# Altium PCB PCB1.PcbDoc
Units mil, origin at the board's own origin, x right, y up, seen from the top; angles counter-clockwise.
Board outline 944.88 x 1338.58 mil, 2 copper layers (Top Layer, Bottom Layer); 32 components, 19 nets, 113 pads, 27 vias.
Unrouted connection lines stored in the file: 23.
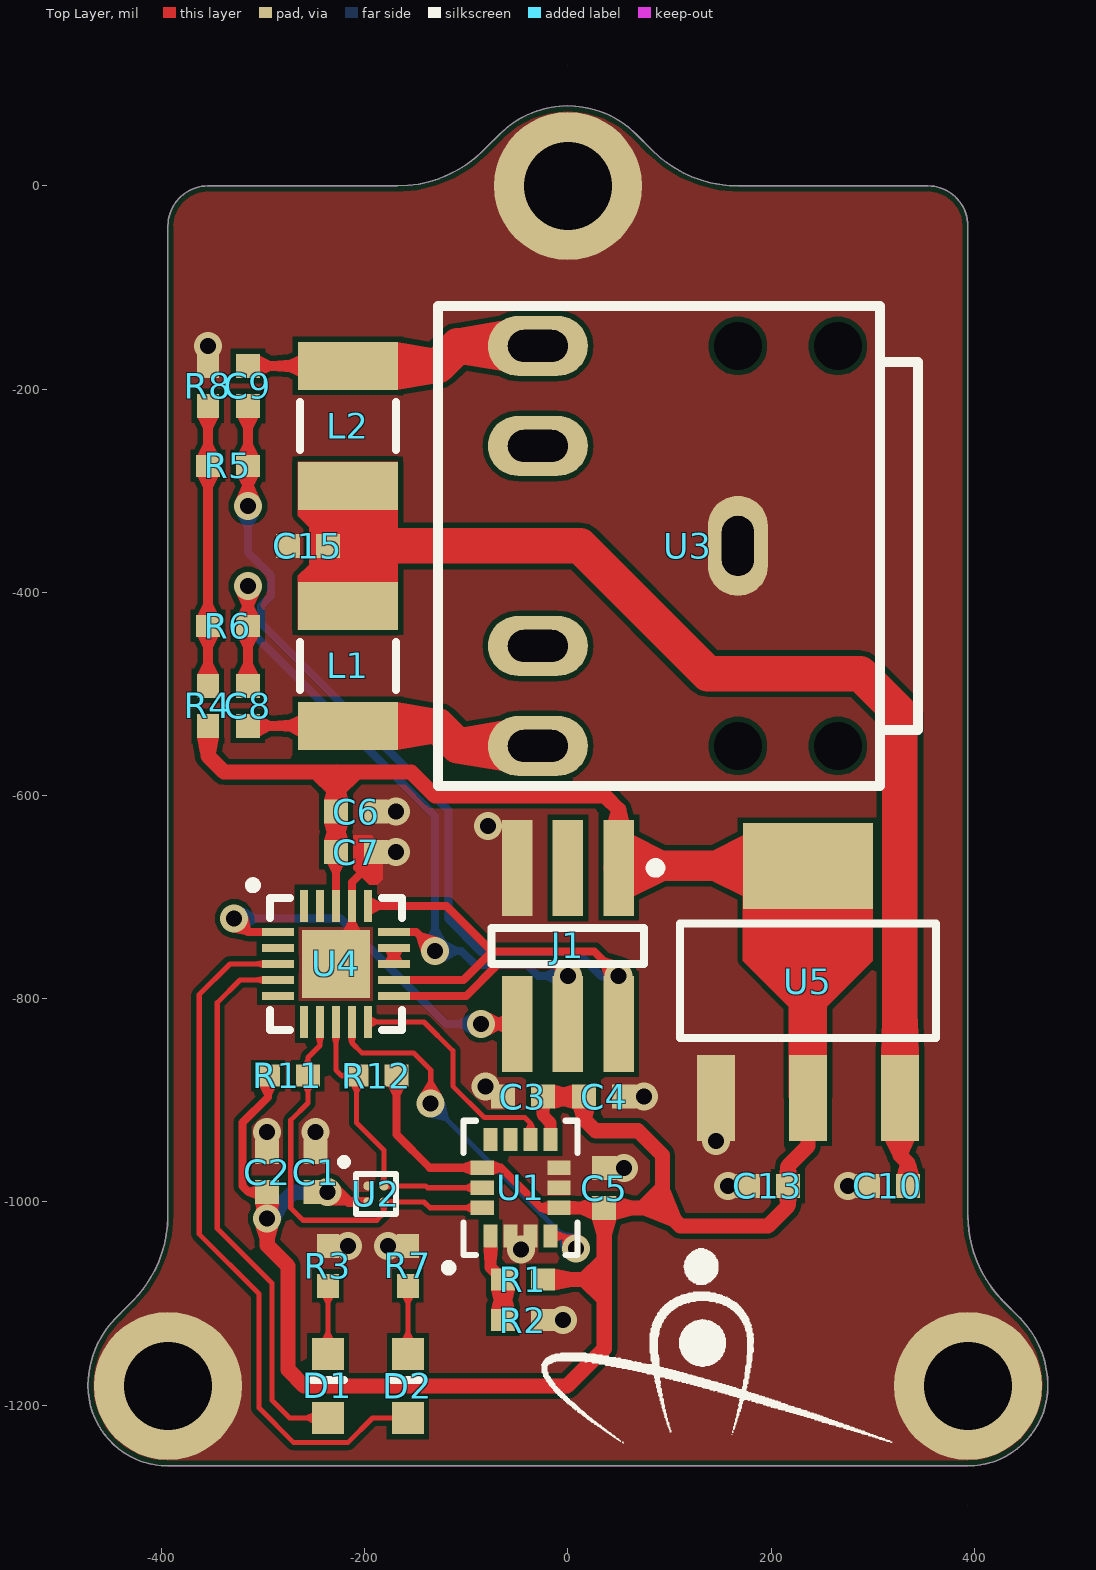
[diagram p0: Top Layer view]
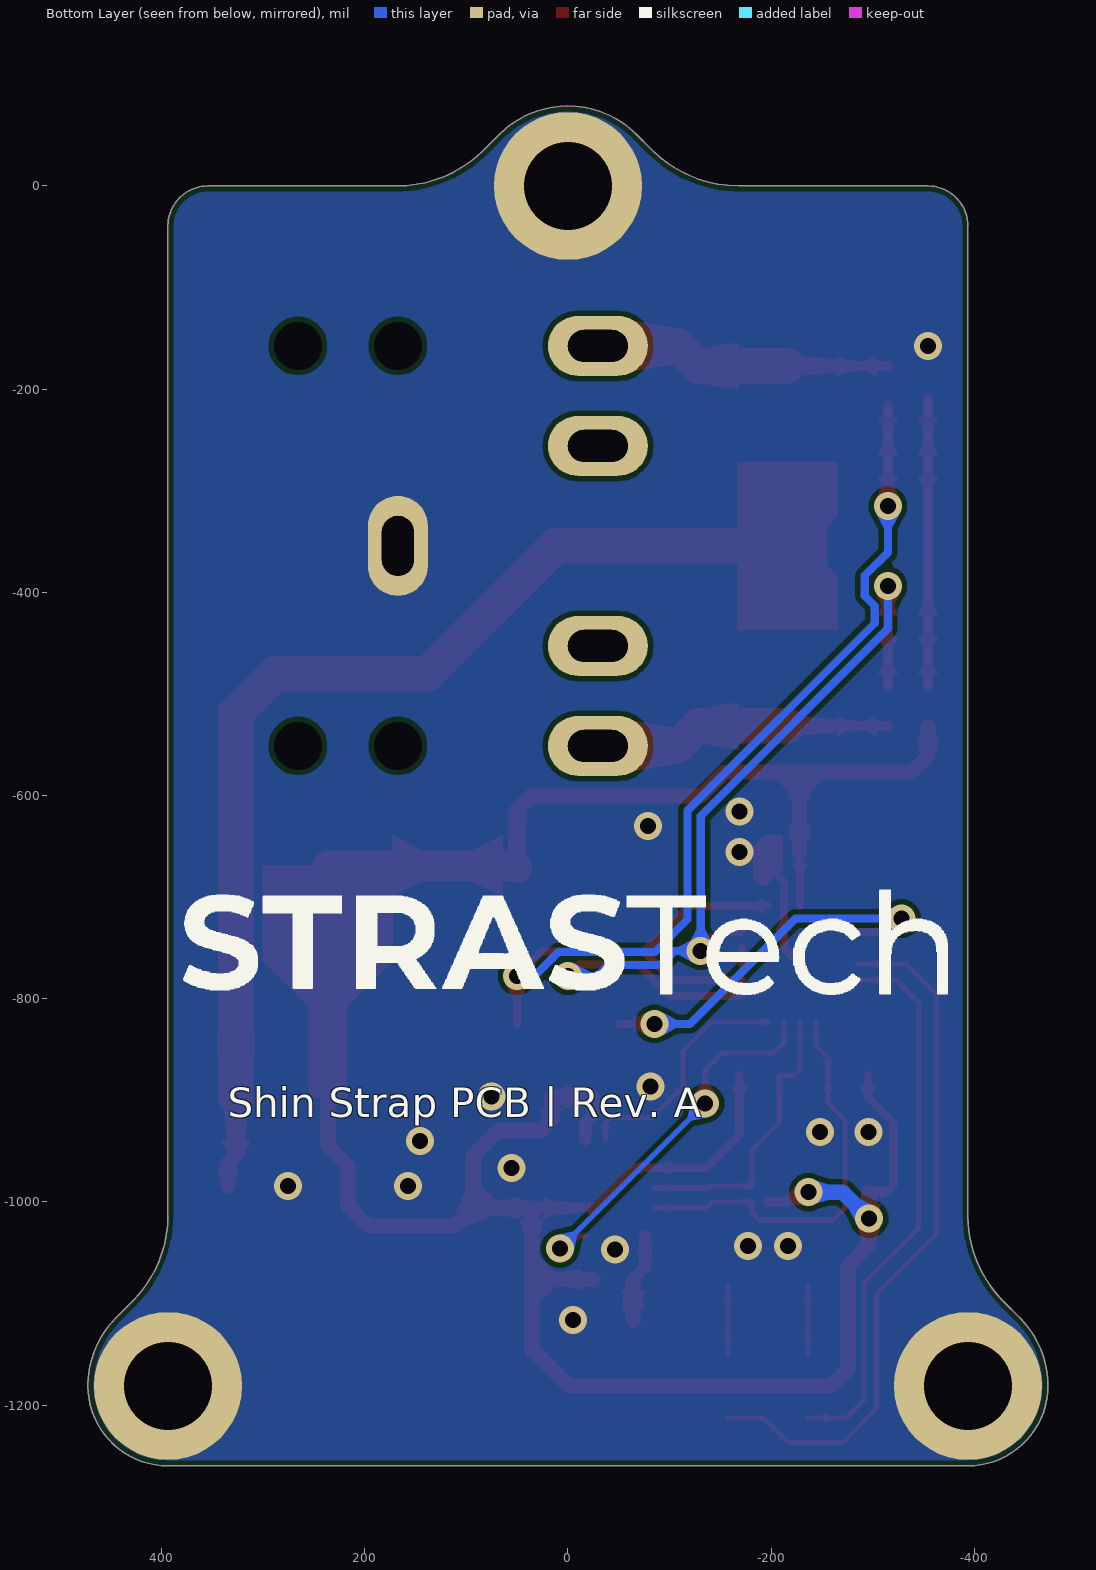
[diagram p1: Bottom Layer view, seen from below]
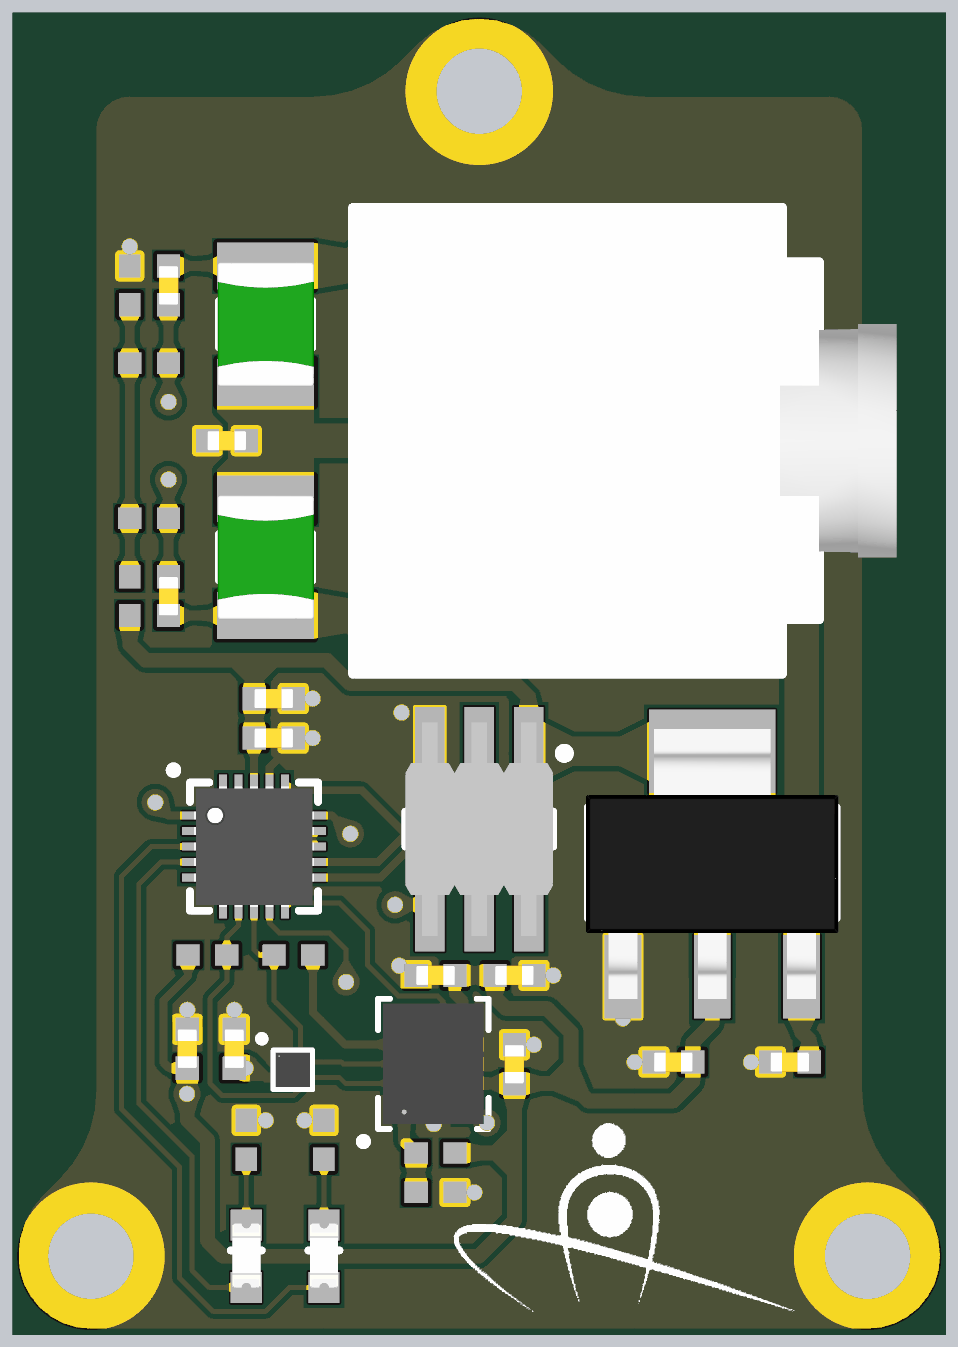
[diagram p2: 3D render of the assembled board from above, using the file's embedded part models]

## Layer stack, top to bottom
Top Solder: solder mask 0.4, Solder Resist, Dk 3.5
Top Layer: signal copper 1.4
Dielectric 1: dielectric 12.6, FR-4, Dk 4.8
Bottom Layer: signal copper 1.4
Bottom Solder: solder mask 0.4, Solder Resist, Dk 3.5

## Board outline
-472.44,-1181.1 cw(c-377.39,-1181.1) -444.6,-1113.89 -429.06,-1098.35 ccw(c-514.41,-1012.99) -393.7,-1012.99 -393.7,-39.37 cw(c-354.33,-39.37) -354.33,0 -168.11,0 ccw(c-168.11,120.71) -82.76,35.36 -67.21,50.9 cw(c0,-16.31) 0,78.74 cw(c0,-16.31) 67.21,50.9 82.75,35.36 ccw(c168.11,120.71) 168.11,0 354.33,0 cw(c354.33,-39.37) 393.7,-39.37 393.7,-1012.99 ccw(c514.41,-1012.99) 429.06,-1098.35 444.6,-1113.89 cw(c377.39,-1181.1) 472.44,-1181.1 cw(c393.7,-1181.1) 393.7,-1259.84 -393.7,-1259.84 cw(c-393.7,-1181.1)

## Design rules (kind name [scope] priority, off if disabled: settings)
Clearance [All] p1: gap=5 ignorepadtopadclearanceinfootprint=FALSE except(0: Arc-Hole Track-Hole SMDPad-Hole THPad-Hole Via-Hole Fill-Hole Poly-Hole Region-Hole Text-Hole)
MinimumSolderMaskSliver [All] p1: minsoldermaskwidth=0
PlaneClearance [All] p1: clearance=10
PlaneConnect [All] p1: planeconnectstyle=Direct reliefexpansion=20 reliefentries=4 reliefconductorwidth=10 reliefairgap=10
PolygonConnect [All] p1: connectstyle=Direct reliefconductorwidth=10 reliefentries=4 polygonreliefangle="90 Angle" airgapwidth=10
RoutingVias [All] p1: holewidth=15.75 width=27.56 viastyle="Through Hole" minholewidth=15.75 minwidth=27.56 maxholewidth=15.75 maxwidth=27.56
SilkToSilkClearance [All] p1: silktosilkclearance=0
SilkToSolderMaskClearance [IsPad] p1: minsilkscreentomaskgap=0 clearancetoexposedcopper=TRUE
SolderMaskExpansion [All] p1: expansion=4 istentingtop=FALSE
Width [All] p1: maxlimit=100 minlimit=5 preferedwidth=10
25 further rules are at their usual default settings.

## Components (designator, comment, footprint, x,y, rotation, side; value= is the part's Value field where it differs from the comment)
C1 "100nF" Cap,SMD,0402 -248.35,-970.7 r90 top
C2 "1uF" Cap,SMD,0402 -295.99,-970.7 r270 top
C3 "100nF" Cap,SMD,0402 -44.33,-896.38 r0 top
C4 "1uF" Cap,SMD,0402 35.67,-896.38 r180 top
C5 "100nF" Cap,SMD,0402 35.67,-986.38 r270 top
C6 "1uF" Cap,SMD,0402 -208.35,-615.75 r180 top
C7 "100nF" Cap,SMD,0402 -208.35,-655.75 r180 top
C8 "100nF" Cap,SMD,0402 -314.96,-511.81 r270 top
C9 "100nF" Cap,SMD,0402 -314.96,-196.85 r90 top
C10 "10uF" Cap,SMD,0402 314.96,-984.25 r0 top
C13 "10uF" Cap,SMD,0402 196.85,-984.25 r0 top
C15 "10uF" Cap,SMD,0402 -255.9,-354.33 r0 top
D1 "Red" LED,0603 -236.22,-1181.1 r90 top
D2 "Green" LED,0603 -157.48,-1181.1 r90 top
J1 "Term,Header,3x2 Pin,1.27mm,SMD" TERM,HEADER,3X2PIN,P1.27,SMD 0,-748.03 r270 top
L1 "1mH" IND,1210 -216.54,-472.44 r90 top
L2 "1mH" IND,1210 -216.54,-236.22 r270 top
R1 "0R" RES,0402 -44.33,-1076.38 r180 top
R2 "0R" RES,0402 -44.33,-1116.38 r180 top
R3 "150R" RES,0402 -236.22,-1062.99 r90 top
R4 "10k" RES,0402 -354.33,-511.81 r270 top
R5 "470k" RES,0402 -334.65,-275.59 r180 top
R6 "470k" RES,0402 -334.65,-433.07 r180 top
R7 "150R" RES,0402 -157.48,-1062.99 r90 top
R8 "10k" RES,0402 -354.33,-196.85 r270 top
R11 "10k" RES,0402 -275.59,-875.75 r180 top
R12 "10k" RES,0402 -188.35,-875.75 r0 top
U1 "ISM330DHCXTR" IC,LGA-14L,2.5x3mm -46.59,-986.07 r90 top
U2 "MMC5633NJL" IC,WLP,2x2,P0.4mm -196.85,-984.25 r0 top
U3 "Conn,Jack,TRS,3.5mm,Thru" CONN,JACK,TRS,3.5MM,THRU 118.11,-354.33 r180 top
U4 "PIC18F14Q40-I/REB" IC,QFN-20,3x3,PAD,P0.4 -228.35,-765.75 r0 top
U5 "TLV1117LV33DCYR" SOT223 236.22,-897.64 r0 top

## Footprints (in the part's own frame and the unit in brackets; to place one, negate y for a bottom-side part, rotate by r counter-clockwise, add the part's x,y. Pads: shape width x height; smd on the part's side, far side on the other; paste and mask are expansions set on the pad)
Cap,SMD,0402 [mm] "KEMET C0402C100K5GACTU"
  rect 0.6x0.6 smd: 1(-0.5,0) 2(0.5,0)
  body extent -0.5,-0.25 0.5,0.25, height 0.5
CONN,JACK,TRS,3.5MM,THRU [mm] "CUI Devices SJ1-3525N"
  round 0 hole 1.2 unplated mask+0.05: 0(-3.75,5) 0(-3.75,-5) 0(-1.25,5) 0(-1.25,-5)
  rrect100% 1.5x2.5 hole 0.8 slot 1.5 at 90 deg mask+0.05: 1(-1.25,0)
  rrect100% 2.5x1.5 hole 0.8 slot 1.5 at 0 deg mask+0.05: 2(3.75,-5) 3(3.75,5) 10(3.75,-2.5) 11(3.75,2.5)
  silkscreen extent -5.75,-6 6.25,6, body extent -7.75,-6 6.25,6, height 5.6
IC,LGA-14L,2.5x3mm [mil] "STMicroelectronics ISM330DHCXTR"
  rect 23x14 smd paste+0 mask+1.97: 1(-47.5,29.53) 2(-47.5,9.84) 3(-47.5,-9.85) 4(-47.5,-29.54) 8(47.5,-29.54) 9(47.5,-9.85) 10(47.5,9.84) 11(47.5,29.53)
  rect 14x23 smd paste+0 mask+1.97: 5(-19.69,-37.74) 6(0,-37.74) 7(19.69,-37.74) 12(19.69,37.74) 13(0,37.74) 14(-19.69,37.74)
  silkscreen extent -82,-56 66,75, body extent -61,-51 61,51, height 65
IC,QFN-20,3x3,PAD,P0.4 [mm] "Semtech SX1508B"
  rect 0.8x0.2 smd mask+0.05: 1(-1.45,0.8) 2(-1.45,0.4) 3(-1.45,0) 4(-1.45,-0.4) 5(-1.45,-0.8) 11(1.45,-0.8) 12(1.45,-0.4) 13(1.45,0) 14(1.45,0.4) 15(1.45,0.8)
  rect 0.2x0.8 smd mask+0.05: 6(-0.8,-1.45) 7(-0.4,-1.45) 8(0,-1.45) 9(0.4,-1.45) 10(0.8,-1.45) 16(0.8,1.45) 17(0.4,1.45) 18(0,1.45) 19(-0.4,1.45) 20(-0.8,1.45)
  rect 1.7x1.7 smd mask+0.05: 21(0,0)
  silkscreen extent -2.17,-1.65 1.65,2.07, body extent -1.55,-1.55 1.55,1.55, height 0.6
IC,WLP,2x2,P0.4mm [mm] "Memsic Inc. MMC5633NJL"
  round 0.23 smd mask+0.05: A1(0,0) A2(0.4,0) B1(0,-0.4) B2(0.4,-0.4)
  silkscreen extent -0.67,-0.7 0.7,0.67, body extent -0.24,-0.64 0.64,0.24, height 0.61
IND,1210 [mm] "Taiyo Yuden CBC3225T102MR"
  rect 1.2x2.5 smd: 1(-1.5,0) 2(1.5,0)
  silkscreen extent -0.6,-1.2 0.6,1.2, body extent -1.6,-1.25 1.6,1.25, height 0.96
LED,0603 [mm] "Stanley Electric Co THG1111C-0005-TR"
  rect 0.8x0.8 smd mask+0.05: 1(-0.8,0) 2(0.8,0)
  silkscreen extent 0.15,-0.4 0.15,0.4, body extent -0.81,-0.37 0.84,0.36, height 0.68
RES,0402 [mm] "Yageo RC0402FR-0722RL"
  rect 0.6x0.55 smd: 1(-0.5,0) 2(0.5,0)
  body extent -0.5,-0.25 0.5,0.25, height 0.35
SOT223 [mm] "Texas Instruments TLV1117LV33DCYR"
  rect 0.95x2.15 smd mask+0.05: 1(-2.3,0) 2(0,0) 3(2.3,0)
  rect 3.25x2.15 smd mask+0.05: 4(0,5.8)
  silkscreen extent -3.2,1.5 3.2,4.36, body extent -3.25,-0.58 3.25,6.38, height 1.65
TERM,HEADER,3X2PIN,P1.27,SMD [mm] "Amphenol ICC (FCI) 20021121-00006C4LF"
  rect 2.4x0.76 smd mask+0.05: 1(-1.95,1.27) 2(-1.95,0) 3(-1.95,-1.27) 4(1.95,-1.27) 5(1.95,0) 6(1.95,1.27)
  silkscreen extent -2.07,-1.91 0.45,2.31, body extent -2.75,-1.91 2.75,1.91, height 4.5

## Part data
C1 C3 C5 C7 C8 C9: library part CAP,Cer,100nF,25VDC,X7R,0402, "0.1µF ±10% 25V Ceramic Capacitor X7R 0402 (1005 Metric)", Manufacturer="Murata Electronics", Manufacturer Part Number=GRM155R71E104KE14J, Vendor Part Number=490-14603-1-ND, CreatedBy="Judd Foster", HelpURL=https://search.murata.co.jp/Ceramy/image/img/A01X/G101/ENG/GRM155R71E104KE14-01.pdf, Vendor=Digikey
C2 C4 C6: library part CAP,Cer,1uF,35VDC,X5R,0402, "1 µF ±10% 35V Ceramic Capacitor X5R 0402 (1005 Metric)", Manufacturer="TDK Corporation", Manufacturer Part Number=C1005X5R1V105K050BC, Vendor Part Number=445-9073-1-ND, CreatedBy="Judd Foster", HelpURL=https://product.tdk.com/info/en/catalog/datasheets/mlcc_commercial_general_en.pdf?ref_disty=digikey, Vendor=Digikey
C10 C13 C15: library part CAP,Cer,10uF,10VDC,X5R,0402, "10 µF ±20% 10V Ceramic Capacitor X5R 0402 (1005 Metric)", Manufacturer="Samsung Electro-Mechanics", Manufacturer Part Number=CL05A106MP5NUNC, Vendor Part Number=1276-1450-1-ND, CreatedBy="Judd Foster", HelpURL=https://media.digikey.com/pdf/Data%20Sheets/Samsung%20PDFs/CL05A106MP5NUNC_Spec.pdf, Vendor=Digikey
D1: library part LED,Red,SMD,0603, "Red 633nm LED Indication - Discrete 2V 0603 (1608 Metric)", Manufacturer="Lite-On Inc.", Manufacturer Part Number="LS Q976-NR-1", Vendor Part Number=475-2512-1-ND, CreatedBy="Judd Foster", HelpURL=https://dammedia.osram.info/media/resource/hires/osram-dam-2493499/LS%20Q976.pdf, Vendor=Digikey
D2: library part LED,Green,SMD,0603, "Green 530nm LED Indication - Discrete 3V 0603 (1608 Metric)", Manufacturer="Stanley Electric Co", Manufacturer Part Number=THG1111C-0005-TR, Vendor Part Number=404-1286-1-ND, CreatedBy="Judd Foster", HelpURL=http://www.stanley-components.com/php/downloaddatafile.php?rp=0,THG1111C-0005_e.pdf, Vendor=Digikey
J1: "Connector Header Surface Mount 6 position 0.050\" (1.27mm)", Manufacturer="Amphenol ICC (FCI)", Manufacturer Part Number=20021121-00006C4LF, Vendor Part Number=609-3693-1-ND, CreatedBy="Judd Foster", HelpURL=https://media.digikey.com/pdf/Data%20Sheets/FCI%20PDFs/Minitek%20127_Catalog.pdf, Vendor=Digikey
L1 L2: library part IND,1mH,100mA,Wirewound,1210, "1 mH Unshielded Wirewound Inductor 100 mA 16.9Ohm Max 1210 (3225 Metric)", Manufacturer="Taiyo Yuden", Manufacturer Part Number=CBC3225T102MR, Vendor Part Number=587-CBC3225T102MRCT-ND, CreatedBy="Judd Foster", HelpURL=https://ds.yuden.co.jp/TYCOMPAS/ut/detail?pn=CBC3225T102MR%20&u=M, Vendor=Digikey
R1 R2: library part RES,0R0,0.1W,0402, "0 Ohms Jumper 0.1W, 1/10W Chip Resistor 0402 (1005 Metric) Automotive AEC-Q200 Thick Film", Manufacturer="Panasonic Electronic Components", Manufacturer Part Number=ERJ-2GE0R00X, Vendor Part Number=P0.0JCT-ND, CreatedBy="Judd Foster", HelpURL=https://industrial.panasonic.com/cdbs/www-data/pdf/RDA0000/AOA0000C301.pdf, Vendor=Digikey
R3 R7: library part RES,150R,1%,0.1W,0402, "150 Ohms ±1% 0.063W, 1/16W Chip Resistor 0402 (1005 Metric) Automotive AEC-Q200, Moisture Resistant Thick Film", Manufacturer="TE Connectivity Passive Product", Manufacturer Part Number=CRGCQ0402F150R, Vendor Part Number=A129617CT-ND, CreatedBy="Judd Foster", HelpURL=https://www.te.com/commerce/DocumentDelivery/DDEController?Action=srchrtrv&DocNm=1773204-3&DocType=DS&DocLang=English, Vendor=Digikey
R4 R8 R11 R12: library part RES,10k,5%,0.063W,0402, "10 kOhms ±5% 0.063W, 1/16W Chip Resistor 0402 (1005 Metric) Automotive AEC-Q200 Thick Film", Manufacturer="Stackpole Electronics Inc", Manufacturer Part Number=RMCF0402JT10K0, Vendor Part Number=RMCF0402JT10K0CT-ND, CreatedBy="Judd Foster", HelpURL=https://www.seielect.com/catalog/sei-rmcf_rmcp.pdf, Vendor=DIgikey
R5 R6: library part RES,470k,5%,0.063W,0402, "470 kOhms ±5% 0.063W, 1/16W Chip Resistor 0402 (1005 Metric) Automotive AEC-Q200 Thick Film", Manufacturer="Stackpole Electronics Inc", Manufacturer Part Number=RMCF0402JT470K, Vendor Part Number=RMCF0402JT470KCT-ND, CreatedBy="Judd Foster", HelpURL=https://www.seielect.com/catalog/sei-rmcf_rmcp.pdf, Vendor=Digikey
U1: "Accelerometer, Gyroscope, Temperature, 6 Axis Sensor I²C, SPI Output", Manufacturer=STMicroelectronics, Vendor Part Number=497-19784-1-ND, CreatedBy="Judd Foster", HelpURL=https://www.st.com/resource/en/datasheet/ism330dhcx.pdf, Manufacturer Part Number=ISM330DHCXTR, Vendor=Digikey
U2: "Magnetoresistive Sensor X, Y, Z Axis 4-WLP (0.85x0.85)", Manufacturer="Memsic Inc.", Vendor Part Number=1267-MMC5633NJLCT-ND, CreatedBy="Judd Foster", HelpURL=https://media.digikey.com/pdf/Data%20Sheets/MEMSIC%20PDFs/MMC5633NJL_RevA_3-12-20.pdf, Manufacturer Part Number=MMC5633NJL, Vendor=Digikey
U3: "3.50mm (0.141\", 1/8\", Mini Plug) - Headphone Phone Jack Stereo (3 Conductor, TRS) Connector Solder", Manufacturer="CUI Devices", Manufacturer Part Number=SJ1-3525N, Vendor Part Number=CP1-3525N-ND, CreatedBy="Judd Foster", HelpURL=https://www.cuidevices.com/product/resource/sj1-352xn.pdf, Vendor=Digikey
U4: "PIC series Microcontroller IC 8-Bit 64MHz 16KB (16K x 8) FLASH 20-VQFN (3x3)", Manufacturer="Microchip Technology", Vendor Part Number=150-PIC18F14Q40-I/REB-ND, CreatedBy="Judd Foster", HelpURL=https://ww1.microchip.com/downloads/en/DeviceDoc/PIC18F04-05-14-15-Q40-1420-Pin-Low-Power-High-Performance-Microcontroller-With-XLP-Technology-Data-Sheet-40002236B.pdf, Manufacturer Part Number=PIC18F14Q40-I/REB, Vendor=Digikey
U5: "Linear Voltage Regulator IC  1 Output  1A SOT-223-4", Manufacturer="Texas Instruments", Vendor Part Number=296-28778-1-ND, CreatedBy="Judd Foster", HelpURL=http://www.ti.com/lit/ds/symlink/tlv1117lv.pdf, Manufacturer Part Number=TLV1117LV33DCYR, Vendor=Digikey

## Free pads (board coordinates)
  round 145.67 hole 86.61 mask+1.97: 0(-393.7,-1181.1) 0(0,0) 0(393.7,-1181.1)

## Via types
v1: diameter 27.56, hole 15.75, Top Layer to Bottom Layer, tented both sides, 27 vias

## Nets (pads, with @x,y where several pads share a name; then routed paths per layer and width w, separated by ;. In a path a pad name is that pad's centre, name@x,y a point inside that pad or via, vN(x,y) a via of type N, cw(c..) or ccw(c..) an arc to the next point about the centre after c; other vN are vias at no path point)
CMPO/RX: U4.13 U4.14 | length 15.7
  Top Layer w8: U4.13 U4.14
DATAN/PGC: C8.1 J1.5 R6.1 U4.11 U4.15 | length 911.7
  Top Layer w8: U4.11 -100.04,-797.24 -69.23,-766.44 -11.12,-766.44 v1(0,-777.56) ; U4.15 -149.29,-734.25 v1(-130.69,-752.85)
  Top Layer w10: C8.1 R6.1 v1(-314.96,-393.7)
  Bottom Layer w8: v1(-314.96,-393.7) -314.96,-435.8 -130.69,-620.07 v1(-130.69,-752.85) -105.04,-752.85 -90.94,-766.95 -39.81,-766.95 -29.2,-777.56 v1(0,-777.56)
DATAP/PGD: C9.1 J1.6 R5.1 U4.12 U4.16 | length 1216.8
  Top Layer w8: U4.16 -119.4,-708.66 -74.62,-753.44 ; U4.12 -102.67,-781.5 -74.62,-753.44 ; J1.6 v1(50,-777.56) 25.88,-753.44 -74.62,-753.44
  Top Layer w10: v1(-314.96,-314.96) R5.1 C9.1@-314.96,-216.54
  Bottom Layer w8: v1(-314.96,-314.96) -314.96,-360.79 -292.18,-383.57 -292.18,-403.7 -301.96,-413.48 -301.96,-430.42 -117.69,-614.69 -117.69,-617.94 -117.69,-721.82 -85.55,-753.95 9.13,-753.95 32.73,-777.56 v1(50,-777.56)
GND: C1.2 C2.1 C3.1 C4.1 C5.1 C6.1 C7.1 C10.1 C13.1 C15.1 J1.3 pad.0 R2.1 R3.2 R7.2 R8.1 U1.2 U1.3 U1.6 U1.7 U2.A1 U3.1 U4.17 U4.21 U5.1 | length 126.4
  Top Layer w8: U4.21 -212.6,-750 U4.17 -212.6,-685.35 -188.66,-661.4 C7.1
  other v1: -4.96,-1116.38 -46.13,-1046.98 -216.54,-1043.31 -177.16,-1043.3 157.48,-984.25 275.59,-984.25 55.35,-966.69 145.67,-939.96 -295.99,-931.33 -248.34,-931.33 75.04,-896.38 -81.06,-886.54 -168.98,-655.75 -78.74,-629.92 -168.98,-615.75 -354.33,-157.48
I2C_SCL: R12.1 U1.13 U2.A2 U4.8 | length 287.2
  Top Layer w5: U4.8 -228.35,-870.33 -222.93,-875.75 R12.1 -208.03,-922.2 -181.1,-949.13 U2.A2 -140.03,-984.25 -138.21,-986.07 U1.13
I2C_SDA: R11.1 U1.14 U2.B2 U4.7 | length 404.8
  Top Layer w5: U4.7 -244.09,-845.95 -255.91,-857.76 R11.1 -255.91,-902.7 -272.81,-919.6 -272.81,-1006.05 -260.85,-1018.01 -188.17,-1018.01 -181.1,-1010.95 U2.B2 -141.55,-1000 -135.79,-1005.76 U1.14
ISM330_INT1: U1.4 U4.9 | length 374.9
  Top Layer w5: U4.9 -212.6,-843.57 -202.88,-853.29 -151.9,-853.29 -135.02,-870.17 v1(-135.02,-903.07) ; U1.4 -3.35,-1033.57 7.8,-1044.72 v1(7.8,-1045.89)
  Bottom Layer w5: v1(-135.02,-903.07) v1(7.8,-1045.89)
ISM330_INT2: U1.9 U4.10 | length 237.9
  Top Layer w5: U4.10 -141.6,-822.83 -113.27,-851.16 -113.27,-886.06 -82.22,-917.11 -42.13,-917.11 -36.74,-922.5 U1.9
LED1: D1.1 U4.4 | length 544.9
  Top Layer w5: U4.4 -322.8,-781.5 -345.17,-803.87 -345.17,-1026.14 -291.23,-1080.08 -291.23,-1195.2 -273.83,-1212.6 D1.1
LED2: D2.1 U4.3 | length 691.9
  Top Layer w5: U4.3 -332.68,-765.75 -362.86,-795.93 -362.86,-1031.77 -303.91,-1090.72 -303.91,-1202.93 -269.9,-1236.94 -216.66,-1236.94 -192.32,-1212.6 D2.1
M\C\L\R\: J1.4 U4.1 | length 369.9
  Top Layer w8: v1(-328.44,-720.99) -315.18,-734.25 U4.1 ; v1(-85.36,-824.8) J1.4
  Bottom Layer w8: v1(-328.44,-720.99) -223.89,-720.99 -120.08,-824.8 v1(-85.36,-824.8)
NetC8_2: C8.2 L1.1 U3.3 | length 293.6
  Top Layer w10: C8.2 L1.1
  Top Layer w35: L1.1 -127.97,-531.5 -108.28,-551.18 U3.3
NetC9_2: C9.2 L2.1 U3.2 | length 293.6
  Top Layer w10: C9.2 L2.1
  Top Layer w35: L2.1 -127.97,-177.17 -108.28,-157.48 U3.2
NetD1_2: D1.2 R3.1 | length 66.9
  Top Layer w5: D1.2 R3.1
NetD2_2: D2.2 R7.1 | length 66.9
  Top Layer w5: D2.2 -157.48,-1108.4 R7.1
NetR1_2: R1.2 R2.2 U1.1 | length 87.8
  Top Layer w12: U1.1 -76.12,-1064.27 R1.2
  Top Layer w15: R2.2 R1.2
NetR4_1: R4.1 R5.2 R6.2 R8.2 | length 282.5
  Top Layer w10: R4.1 R6.2 R5.2 R8.2@-354.33,-209.62
VDD_3V3: C1.1 C2.2 C3.2 C4.2 C5.2 C6.2 C7.2 C13.2 J1.1 R1.1 R4.2 R11.2 R12.2 U1.5 U1.8 U1.12 U2.B1 U4.18 U5.2 U5.4 | length 2673
  Top Layer w8: C2.2 -314.32,-990.39 -320.2,-984.5 -320.2,-921.89 -295.28,-896.97 R11.2 ; U4.18 -228.35,-656.06 C7.2 ; R12.2 -168.66,-933.7 -135.98,-966.38 U1.12 -66.05,-966.38 -26.67,-1005.76 U1.5
  Top Layer w10: C1.1 v1(-236.86,-990.39) -225.37,-990.39 -215.76,-1000 U2.B1
  Top Layer w12: C3.2 -24.65,-914.68 -17.05,-922.27 U1.8 ; U1.5@-8.54,-1006.06 C5.2
  Top Layer w15: R4.2 -354.33,-560.96 -338.4,-576.89 -228.03,-576.89 ; C2.2 -296,-1042.59 -275.59,-1062.99 -275.59,-1165.09 -259.58,-1181.1 -0.83,-1181.1 35.67,-1144.61 35.67,-1076.38 ; C7.2 C6.2 -228.03,-576.89 ; R1.1 35.67,-1076.38 ; C3.2 C4.2 ; C4.2 15.99,-918.63 27.32,-929.96 68.99,-929.96 93.08,-954.06 93.08,-1006.06 ; J1.1 50,-614.04 36.35,-600.39 -130.77,-600.39 -154.27,-576.89 -228.03,-576.89 ; U5.2 236.22,-944.88 216.53,-964.57 C13.2 216.53,-1003.94 196.85,-1023.62 110.64,-1023.62 93.08,-1006.06 ; 35.67,-1076.38 C5.2 93.08,-1006.06
  Top Layer w30: J1.1 51.97,-669.29 U5.4
  Bottom Layer w15: v1(-296.32,-1016.49) -270.22,-990.39 v1(-236.86,-990.39)
VDD_5V: C10.2 C15.2 L1.2 L2.2 U5.3 | length 1099.8
  Top Layer w15: U5.3 326.77,-954.1 334.64,-961.97 C10.2
  Top Layer w35: C15.2 12.08,-354.33 137.71,-479.96 287.85,-479.96 326.77,-518.89 U5.3
pads on no net: J1.2 U1.10 U1.11 U3.0 U3.10 U3.11 U4.2 U4.5 U4.6 U4.19 U4.20

## Polygon pours and split planes (outlines as drawn)
GND on Top Layer "NONET_L02_P-001" (solid, remove dead copper, pour order 0): 472.44,78.74 -472.44,78.74 -472.44,-1259.84 472.44,-1259.84
GND on Bottom Layer "NONET_L02_P-001" (solid, remove dead copper, pour order 1): 472.44,78.74 -472.44,78.74 -472.44,-1259.84 472.44,-1259.84

## Keep-outs
Keep-Out Layer:
  lines w0.39: 393.7,-1259.84 ccw(c393.7,-1181.1) 472.44,-1181.1 ccw(c377.39,-1181.1) 444.6,-1113.89 433.07,-1102.36 429.06,-1098.35 cw(c514.41,-1012.99) 393.7,-1012.99 393.7,-964.07 393.7,-39.37 ccw(c354.33,-39.37) 354.33,0 217.03,0 168.11,0 cw(c168.11,120.71) 82.75,35.36 78.74,39.37 67.21,50.9 ccw(c0,-16.31) 0,78.74 ccw(c0,-16.31) -67.21,50.9 -78.74,39.37 -82.76,35.36 cw(c-168.11,120.71) -168.11,0 -217.03,0 -354.33,0 ccw(c-354.33,-39.37) -393.7,-39.37 -393.7,-964.07 -393.7,-1012.99 cw(c-514.41,-1012.99) -429.06,-1098.35 -433.07,-1102.36 -444.6,-1113.89 ccw(c-377.39,-1181.1) -472.44,-1181.1 ccw(c-393.7,-1181.1) -393.7,-1259.84 393.7,-1259.84 ; 393.7,-1259.84 393.7,-1259.84 ; 0,118.11 0,118.11 ; 393.7,-1299.21 393.7,-1299.21

## Other copper
Top Layer:
  pour cut-out: -187.91,-729.41 -228.35,-729.41 -228.35,-667.56 -187.91,-667.56
  region net GND: -211.22,-638.93 -211.22,-672.35 -195.66,-687.91 -187.91,-687.91 -182.17,-682.17 -182.17,-650.42 -193.66,-638.93
  region net VDD_5V: -167.32,-437.01 -167.32,-271.65 -265.75,-271.65 -265.75,-324.8 -254.67,-335.88 -254.67,-372.78 -265.75,-383.86 -265.75,-437.01
  region net VDD_3V3: 254.92,-897.64 254.92,-808.07 300.2,-762.8 300.2,-669.29 172.24,-669.29 172.24,-762.8 217.52,-808.07 217.52,-897.64

## Silkscreen, mask and mechanical layers (free items; w line width, h text height)
Top Overlay:
  drawing of 9 lines, arcs and shapes, not listed
Bottom Overlay:
  drawing of 9 lines, arcs and shapes, not listed
  text "Shin Strap PCB | Rev. A" at 334.65,-926.61 h50